# Altium PCB esp32_pico_d4_motor_driverV4.PcbDoc_2022-05-04.pcbdoc
Units mil, origin at the board's own origin, x right, y up, seen from the top; angles counter-clockwise.
Board outline 1279.91 x 1283.3 mil, 2 copper layers (Top Layer, Bottom Layer); 31 components, 53 nets, 163 pads, 53 vias.
Unrouted connection lines stored in the file: 1.
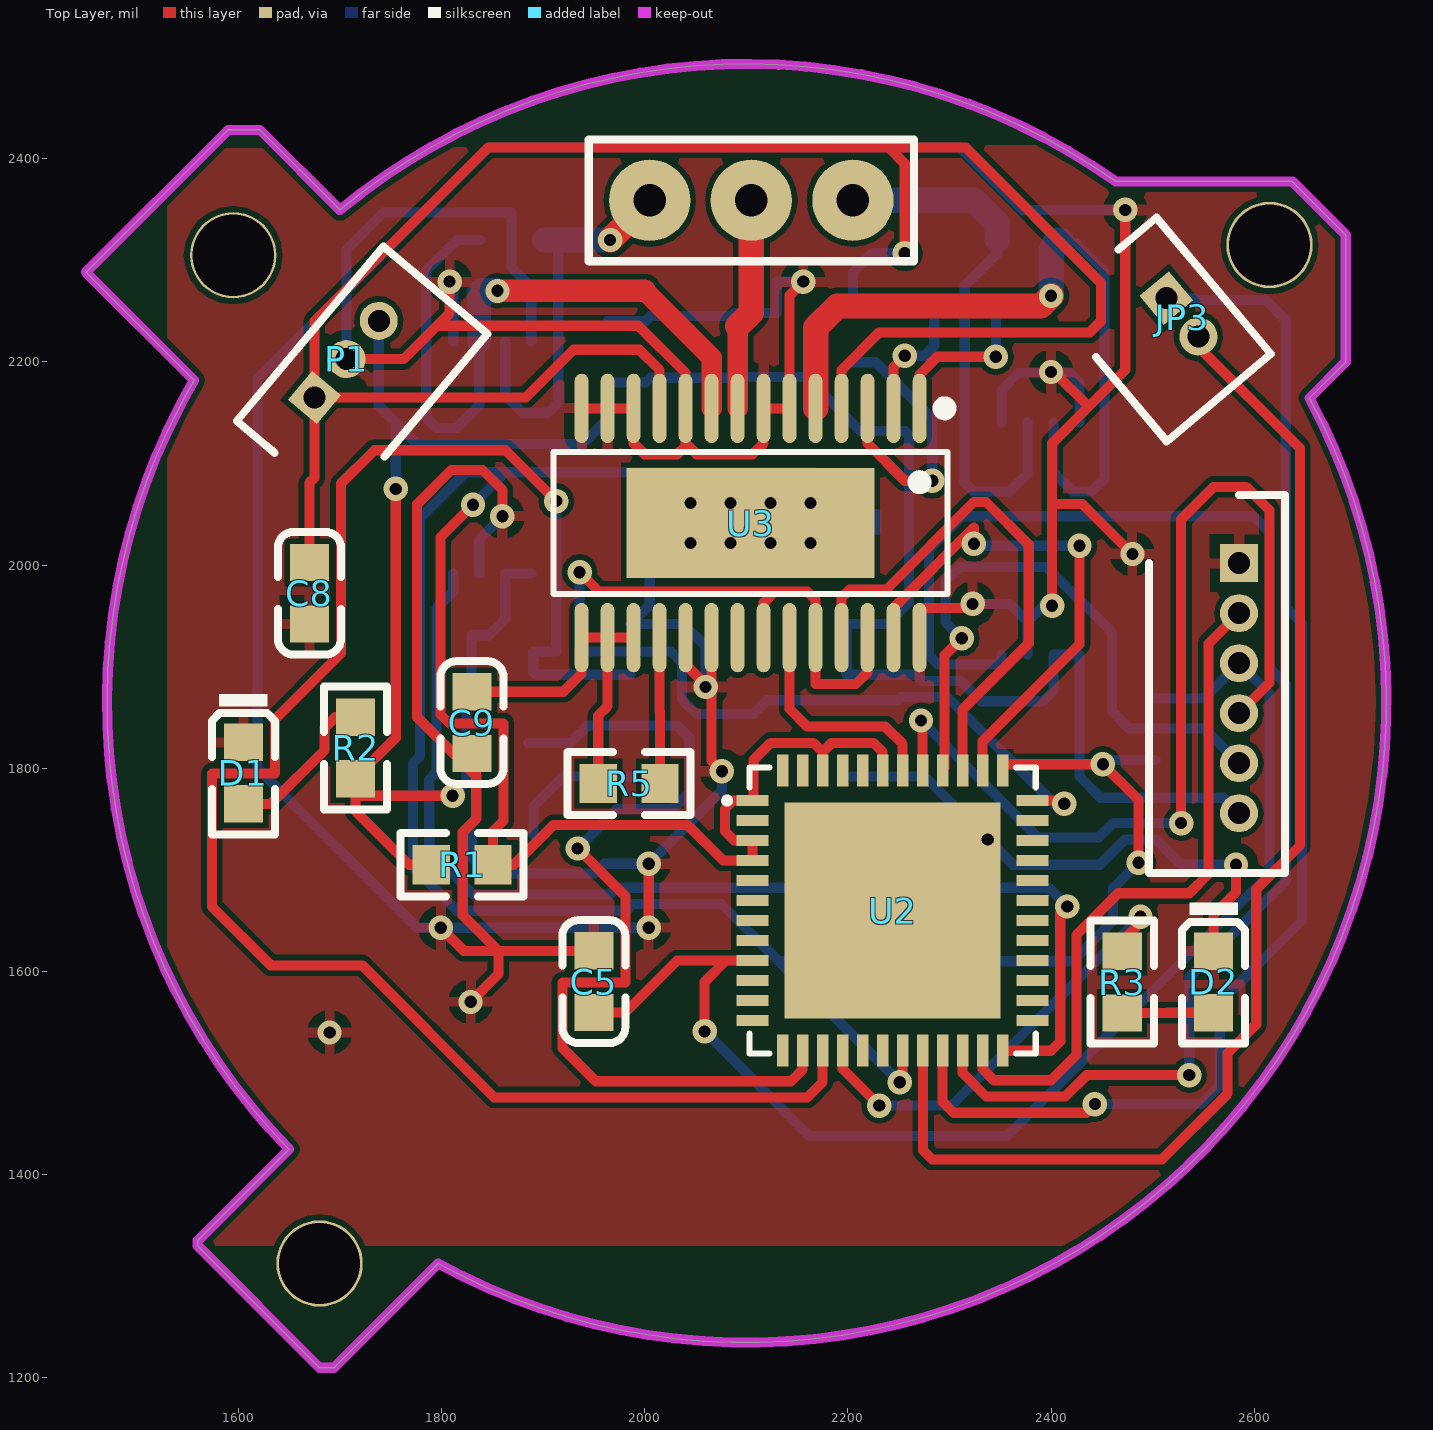
[diagram p0: Top Layer view]
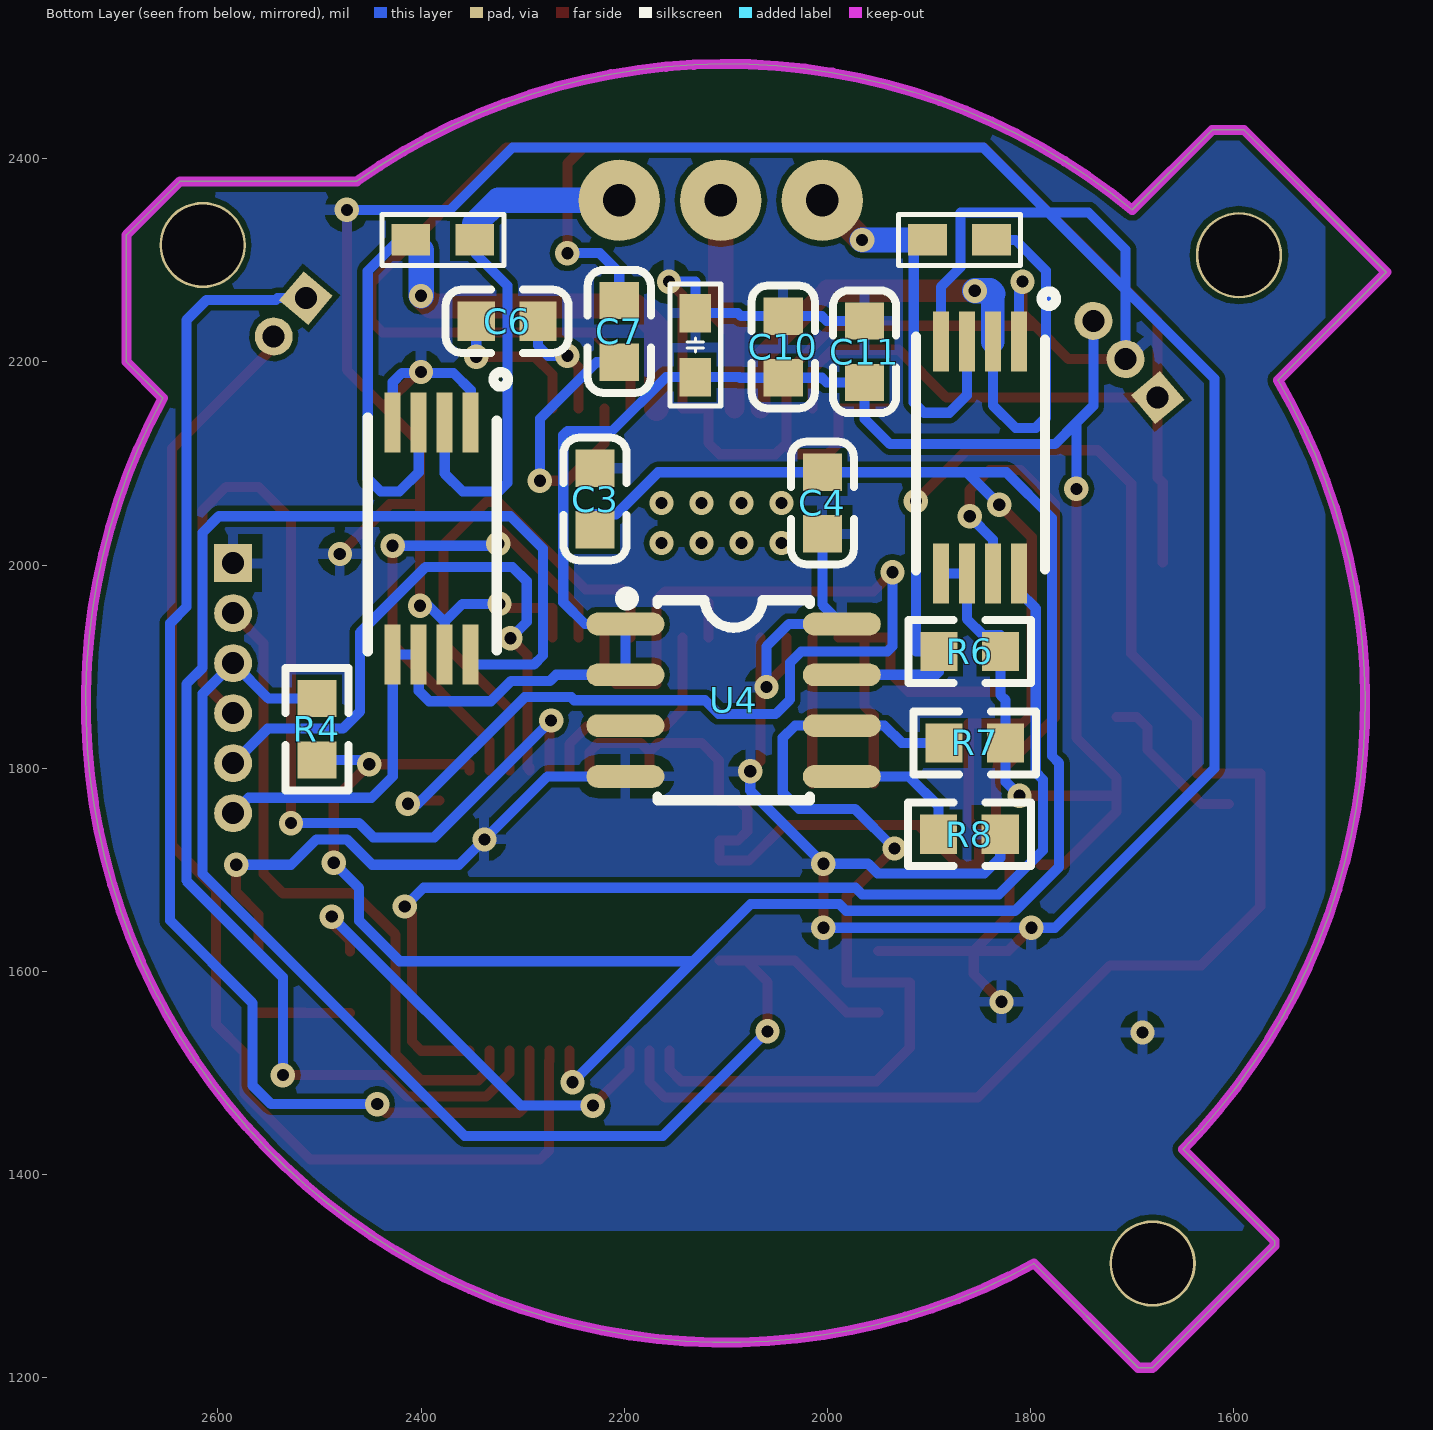
[diagram p1: Bottom Layer view, seen from below]

## Layer stack, top to bottom
Top Solder: solder mask 0.4, Solder Resist, Dk 3.5
Top Layer: signal copper 1.4
Dielectric1: dielectric 12.6, FR-4, Dk 4.8
Bottom Layer: signal copper 1.4
Bottom Solder: solder mask 0.4, Solder Resist, Dk 3.5

## Board outline
1560,1330 1560,1335 1650,1425 cw(c2100,1864.79) 1556.58,2181.99 1556.44,2181.85 1450,2288.3 1590,2428.3 1621.36,2428.3 1700.02,2349.64 1699.92,2349.54 cw(c2100,1864.79) 2463.34,2377.65 2637.35,2377.65 2690,2325 2690,2200 2654.33,2164.33 2654.26,2164.29 cw(c2100,1864.79) 1796.76,1312.57 1694.19,1210 1680,1210

## Design rules (kind name [scope] priority, off if disabled: settings)
Clearance [All] p1: gap=5.6 ignorepadtopadclearanceinfootprint=FALSE
HoleToHoleClearance [All] p1: gap=0 allowstackedmicrovias=TRUE
MinimumSolderMaskSliver [All] p1: minsoldermaskwidth=0
PolygonConnect [All] p1: connectstyle=Relief reliefconductorwidth=10 reliefentries=4 polygonreliefangle="90 Angle" airgapwidth=10
RoutingVias [All] p1: holewidth=12 width=24 viastyle="Through Hole" minholewidth=28 minwidth=50 maxholewidth=28 maxwidth=50
SilkToSilkClearance [All] p1: silktosilkclearance=0
SilkToSolderMaskClearance [IsPad] p1: minsilkscreentomaskgap=0 clearancetoexposedcopper=TRUE
SolderMaskExpansion [All] p1: expansion=4
Width [All] p1: maxlimit=50 minlimit=10 preferedwidth=10
26 further rules are at their usual default settings.

## Classes and differential pairs
component class "esp32_pico_d4_motor_driver.SchDoc_2022-05-04 (1)": C3 C4 C5 C6 C7 C8 C9 C10 C11 D1 D2 P1 R1 R2 R3 R4 R5 R6 R7 R8 U2 U3 U4 U5

## Components (designator, comment, footprint, x,y, rotation, side; value= is the part's Value field where it differs from the comment)
C3 "10uF" 0603_C#1 2228.75,2065 r270 bottom
C4 "100nF" 0603_C#1 2005,2061.09 r90 bottom
C5 "1uF" 0603_C#1 1950,1590 r270 top
C6 "10nF" 0603_C#1 2315.31,2240 r0 bottom
C7 "100nF" 0603_C#1 2205,2230 r90 bottom
C8 "10uF" 0603_C#1 1670,1972.29 r90 top
C9 "1uF" 0603_C#1 1830,1845 r90 top
C10 "100nF" 0603_C#2 2043.59,2214.69 r90 bottom
C11 "10uF (106) 10% 10V" 0603_C#2 1963.5,2210 r90 bottom
CBY1 "0.1μF" 0603C 2130,2216.5 r90 bottom
D1 "蓝灯 0603" 0603_LED_S1 1605,1795.32 r270 top
D2 "蓝灯 0603" 0603_LED_S1 2560,1589.68 r270 top
INA1 "INA240A2" INA240 2389.53,2026.29 r0 bottom
INA2 "INA240A1" INA240 1850,2105.72 r0 bottom
J1 "90120-0763" 10.7MHZ 2205,2359.05 r180 top
JP2 "SPI1" SHDR6 2585,2001.85 r270 top
JP3 "Header 2" SHDR2 2513.37,2262.7 r130 top
P1 "TB002-500-03BE" SHDR3 1675,2165 r230 top
R1 "0Ω (0R0) ±1%" 0603_R#1 1820.32,1705 r180 top
R2 "2KΩ" 0603_R#1 1715.39,1820 r270 top
R3 "2KΩ" 0603_R#1 2470,1589.49 r90 top
R4 "10K" 0603_R#1 2502.57,1838.42 r270 bottom
R5 "10K" 0603_R#1 1984.68,1785 r0 top
R6 "10KΩ" 0603_R#2 1860,1915 r0 bottom
R7 "10K" 0603_R#2 1855,1825 r0 bottom
R8 "1K" 0603_R#2 1860.32,1735 r0 bottom
R11 "10mOhm" 0603R 2378.5,2320 r180 bottom
R12 "10mOhm" 0603R 1870,2320 r0 bottom
U2 "ESP32-PICO-D4" QFN-48_L7.0-W7.0-P0.50-BL-EP5.4 2255,1660 r270 top
U3 "DRV8313PWPR" HTSSOP-28_L9.8-W4.5-P0.65-LS6.6-BL-EP 2104.25,2041.77 r180 top
U4 "AS5600-ASOM" SOIC-8_L5.0-W4.0-P1.27-LS6.0-BL 2135,1840 r90 bottom

## Footprints (in the part's own frame and the unit in brackets; to place one, negate y for a bottom-side part, rotate by r counter-clockwise, add the part's x,y. Pads: shape width x height; smd on the part's side, far side on the other; paste and mask are expansions set on the pad)
10.7MHZ [mil]
  round 80 hole 32: 1(0,0) 2(200,0) 3(100,0)
  silkscreen extent -60,-60 260,60
0603_C#1 [mm]
  rect 0.93x0.98 smd: 1(-0.77,0) 2(0.77,0)
  silkscreen extent -1.53,-0.79 1.54,0.79
0603_C#2 [mm]
  rect 0.93x0.98 smd: 1(0.77,0) 2(-0.77,0)
  silkscreen extent -1.54,-0.79 1.53,0.79
0603_LED_S1 [mm]
  rect 0.93x0.98 smd: A(0.77,0) K(-0.77,0)
  silkscreen extent -1.98,-0.79 1.54,0.79
0603_R#1 [mm]
  rect 0.93x0.98 smd: 1(-0.77,0) 2(0.77,0)
  silkscreen extent -1.54,-0.79 1.54,0.79
0603_R#2 [mm]
  rect 0.93x0.98 smd: 1(0.77,0) 2(-0.77,0)
  silkscreen extent -1.54,-0.79 1.54,0.79
0603C [mil]
  rect 38x31 smd: 1(-31.5,0) 2(31.5,0)
  silkscreen extent -60,-25 60,25
0603R [mil]
  rect 38x31 smd: 1(-31.5,0) 2(31.5,0)
  silkscreen extent -60,-25 60,25
HTSSOP-28_L9.8-W4.5-P0.65-LS6.6-BL-EP [mm]
  oval 0.343x1.731 smd: 1(-4.225,-2.856) 2(-3.575,-2.856) 3(-2.925,-2.856) 4(-2.275,-2.856) 5(-1.625,-2.856) 6(-0.975,-2.856) 7(-0.325,-2.856) 8(0.325,-2.856) 9(0.975,-2.856) 10(1.625,-2.856) 11(2.275,-2.856) 12(2.925,-2.856) 13(3.575,-2.856) 14(4.225,-2.856) 15(4.225,2.875) 16(3.575,2.875) 17(2.925,2.875) 18(2.275,2.875) 19(1.625,2.875) 20(0.975,2.875) 21(0.325,2.875) 22(-0.325,2.875) 23(-0.975,2.875) 24(-1.625,2.875) 25(-2.275,2.875) 26(-2.925,2.875) 27(-3.575,2.875) 28(-4.225,2.875)
  rect 6.2x2.75 smd: 29(0,0.009)
  silkscreen extent -5,-3.01 4.93,1.78
INA240 [mm]
  rect 0.4x1.5 smd mask+0.05: 1(-0.975,-2.9) 2(-0.325,-2.9) 3(0.325,-2.9) 4(0.975,-2.9) 5(0.975,2.9) 6(0.325,2.9) 7(-0.325,2.9) 8(-0.975,2.9)
  silkscreen extent -1.91,-4.16 1.6,2.82, body extent -1.5,-3.3 1.5,3.3, height 1.2
QFN-48_L7.0-W7.0-P0.50-BL-EP5.4 [mm]
  rect 0.28x0.8 smd: 1(-2.75,-3.778) 2(-2.25,-3.778) 3(-1.75,-3.778) 4(-1.25,-3.778) 5(-0.75,-3.778) 6(-0.25,-3.778) 7(0.25,-3.778) 8(0.75,-3.778) 9(1.25,-3.778) 10(1.75,-3.778) 11(2.25,-3.778) 12(2.75,-3.778) 25(2.75,3.222) 26(2.25,3.222) 27(1.75,3.222) 28(1.25,3.222) 29(0.75,3.222) 30(0.25,3.222) 31(-0.25,3.222) 32(-0.75,3.222) 33(-1.25,3.222) 34(-1.75,3.222) 35(-2.25,3.222) 36(-2.75,3.222)
  rect 0.8x0.28 smd: 13(3.5,-3.028) 14(3.5,-2.527) 15(3.5,-2.028) 16(3.5,-1.527) 17(3.5,-1.028) 18(3.5,-0.527) 19(3.5,-0.028) 20(3.5,0.473) 21(3.5,0.972) 22(3.5,1.473) 23(3.5,1.972) 24(3.5,2.473) 37(-3.5,2.473) 38(-3.5,1.972) 39(-3.5,1.473) 40(-3.5,0.972) 41(-3.5,0.473) 42(-3.5,-0.028) 43(-3.5,-0.527) 44(-3.5,-1.028) 45(-3.5,-1.527) 46(-3.5,-2.028) 47(-3.5,-2.527) 48(-3.5,-3.028)
  rect 5.4x5.4 smd: 49(0,-0.277)
  silkscreen extent -3.58,-4.49 3.58,3.3
SHDR2 [mm]
  rect 0.95x0.95 hole 0.55: 1(0,0)
  round 0.95 hole 0.55: 2(-1.25,0)
  silkscreen extent -2.75,-1.11 1.7,2.29
SHDR3 [mm]
  rect 0.95x0.95 hole 0.55: 1(0,0)
  round 0.95 hole 0.55: 2(-1.25,0) 3(-2.5,0)
  silkscreen extent -4,-1.11 1.7,2.29
SHDR6 [mm]
  rect 0.95x0.95 hole 0.55: 1(0,0)
  round 0.95 hole 0.55: 2(1.25,0) 3(2.5,0) 4(3.75,0) 5(5,0) 6(6.25,0)
  silkscreen extent -1.7,-2.25 7.75,1.15
SOIC-8_L5.0-W4.0-P1.27-LS6.0-BL [mil]
  oval 22.38x76.78 smd: 1(101.98,63.89) 2(51.98,63.89) 3(1.98,63.89) 4(-48.02,63.89) 5(-48.02,-149.11) 6(1.98,-149.11) 7(51.98,-149.11) 8(101.98,-149.11)
  silkscreen extent -71,-118 133,68

## Part data
CBY1: library part CAP_1
INA1 INA2: library part INA240
JP2: library part "HEADER 6"
JP3: "Header, 2-Pin"
R11: library part RES2
R12: library part Res1, "Resistor"

## Free pads (board coordinates)
  round 85 hole 80: 8(1595,2305) 8(1680,1312.57) 8(2615,2315)

## Via types
v1: diameter 24, hole 12, Top Layer to Bottom Layer, 38 vias
v2: diameter 24, hole 12, Top Layer to Bottom Layer, tented both sides, 8 vias
v3: diameter 23.62, hole 12, Top Layer to Bottom Layer, 7 vias

## Nets (pads, with @x,y where several pads share a name; then routed paths per layer and width w, separated by ;. In a path a pad name is that pad's centre, name@x,y a point inside that pad or via, vN(x,y) a via of type N, cw(c..) or ccw(c..) an arc to the next point about the centre after c; other vN are vias at no path point)
EN: C5.2 JP2.3 R4.1 U2.9 | length 1278.1
  Top Layer w10: C5.2 1981,1559.69 2032.11,1610.79 2080,1610.79 ; v1(2059,1541) 2059,1589.79 2080,1610.79 ; U2.9 2080,1610.79
  Bottom Layer w10: v1(2059,1541) 2162,1438 2357,1438 2615,1696 2615,1873.42 JP2.3 2550.31,1868.74 R4.1
ENA: U2.36 U3.22 U3.24 U3.26 | length 1148
  Top Layer w10: v1(1936,1993) 1955,1974 2128,1974 ; U3.22 2117.05,1963.05 2128,1974 ; U3.26 2219.41,1894.41 2208,1883 2168.23,1883 U3.24 2168.23,1965.77 2160,1974 2128,1974 ; U2.36 2409.73,1768.27 v1(2413,1765)
  Bottom Layer w10: v1(1936,1993) 1936,1920 1941,1915 2025.9,1915 2036.9,1904 2036.9,1867.59 2051,1853.49 2107,1853.49 2120.51,1867 2249.19,1867 2252.19,1870 2298.05,1870 2403.05,1765 v1(2413,1765)
FLASH_CLK: U2.31
FLASH_CS: U2.25
FLASH_SD0: U2.27
FLASH_SD1: U2.33
FLASH_SD2: U2.30
FLASH_SD3: U2.32
GND: C3.1 C4.1 C5.1 C8.1 C9.1 C10.1 C11.1 CBY1.2 D1.K D2.K INA1.1 INA1.4 INA1.7 INA2.1 INA2.4 INA2.7 JP2.1 P1.2 R8.2 U2.49 U3.6 U3.7 U3.10 U3.12 U3.13 U3.14 U3.19 U3.20 U3.28 U4.4 U4.8 | length 6654.3
  Top Layer w10: P1.2 1762.7,2202.7 1795.62,2235.62 ; v1(1799.32,1643) 1822,1620.32 1856,1620.32 ; v1(1808,2279) 1808,2248 1795.62,2235.62 ; v3(1828.72,1570.18) 1856,1597.45 1856,1620.32 ; C9.1 1834.27,1792 ; v1(1860,2048) 1860,2074 1840.44,2093.56 1809.56,2093.56 1776,2060 1776,1850.27 1834.27,1792 ; U3.14 U3.13 U3.12 1989.09,2119.91 2000,2109 2032,2109 2040.27,2117.27 2040.27,2120 ; C5.1 1856,1620.32 ; v1(2004,1643) v1(2004,1706) ; U3.19 2040.27,1902 2060,1882.27 v1(2060,1880) ; U3.20 2065.86,1807.14 v1(2076,1797) ; v1(2156,2279) 2142.64,2265.64 U3.6 U3.7 2117.05,2120 2106.05,2109 2051.27,2109 2040.27,2120 ; U3.28 2270.59,1957.67 2318.67,1957.67 v1(2322.79,1961.79) ; v3(2400,2189.93) 2403.07,2189.93 2437,2156 ; v1(2401,1960) 2401,2060 ; v1(2473,2349.54) 2473,2192 2437,2156 ; v3(2480,2010.94) 2430.94,2060 2401,2060 ; D2.K 2560,1656 2582,1678 v1(2582,1705) ; 1795.62,2235.62 1993.69,2235.62 2040.27,2189.04 U3.10 2040.27,2120 ; 1834.27,1792 1834.27,1750.4 1821,1737.13 1821,1655.32 1856,1620.32 ; 2401,2060 2401,2120 2437,2156
  Bottom Layer w10: P1.2 1706.63,2270.97 ; v1(1808,2279) 1811.61,2275.39 INA2.1 ; R8.2 1830,1712 1845.45,1696.55 1950.55,1696.55 1960,1706 v1(2004,1706) 2076,1778 v1(2076,1797) ; INA2.7 1837.2,2025.2 v1(1860,2048) ; INA2.4 1888.39,2273.61 1869,2293 1869,2347 1782.66,2347 ; C11.1 2001,2240.31 2005.69,2245 C10.1 2085,2245 2088,2248 CBY1.2 2130,2279 v1(2156,2279) ; v1(2004,1643) v1(1799.32,1643) 1776,1643 1619,1800 1619,2183.34 1706.63,2270.97 ; C4.1 2005,1961.09 U4.8 2038.02,1941.98 2060,1920 v1(2060,1880) ; U4.4 2275.69,1791.98 2362.67,1705 2448,1705 2473,1730 2503,1730 2528,1705 v1(2582,1705) ; v1(2322.79,1961.79) 2359.21,1961.79 2376.87,1944.13 ; INA1.1 2351.14,2172.14 2368,2189 2418.91,2189 2427.91,2180 INA1.4 ; v1(2401,1960) 2392.73,1960 2376.87,1944.13 ; v1(2473,2349.54) 2372.54,2349.54 2372,2349 2310,2411 1846.66,2411 1782.66,2347 ; 1706.63,2270.97 1782.66,2347 ; 1706.63,2270.97 1706.63,2310.63 1743,2347 1782.66,2347 ; 2376.87,1944.13 2376.73,1944 INA1.7 2376.87,1944.13
  other v3: 1690,1540 2337.67,1730
GPIO0: JP2.2 U2.23 | length 667.4
  Top Layer w10: U2.23 2332.66,1504 2343.66,1493 2400,1493 2425,1518 2425,1636 2466,1677 2536,1677 2555,1696 2555,1922.64 JP2.2
GPIO2: INA1.8 U2.22 | length 1388.3
  Top Layer w10: U2.22 2312.98,1500.02 2336,1477 2414,1477 2435,1498 v1(2536,1498)
  Bottom Layer w10: INA1.8 2351.14,1902 2289,1902 2280,1911 2280,2016 2312,2048 2599,2048 2615,2032 2615,1899 2631,1883 2631,1689.37 2536,1594.37 v1(2536,1498)
GPIO4: INA2.8 U2.24 | length 1135.1
  Top Layer w10: U2.24 2352.35,1522 2400,1522 2409,1531 2409,1657 v1(2416,1664)
  Bottom Layer w10: INA2.8 1811.61,1974 1795,1957.39 1795,1796 1788,1789 1788,1719 1831.29,1675.71 1965.72,1675.71 1972.41,1682.39 2397.61,1682.39 v1(2416,1664)
GPIO5: U2.34
GPIO9: U2.28
GPIO10: U2.29
GPIO12: U2.18
GPIO13: JP3.2 U2.20 | length 1244.9
  Top Layer w10: U2.20 2273.61,1512 2274,1511.61 2274,1424 2283,1415 2509,1415 2573.8,1479.8 2573.8,1519.8 2602,1548 2602,1681 2645,1724 2645,2115 2545,2215 JP3.2
GPIO14: U2.17
GPIO15: JP3.1 U2.21 | length 1258.6
  Top Layer w10: U2.21 2293.29,1471.71 2304,1461 2434.66,1461 v1(2443.13,1469.47)
  Bottom Layer w10: v1(2443.13,1469.47) 2547.47,1469.47 2566,1488 2566,1569.1 2647,1650.1 2647,1942.69 2631,1958.69 2631,2241 2611,2261 2543,2261 2541.3,2262.7 JP3.1
GPIO18: U2.35
GPIO19: U2.38 U3.27 | length 522.7
  Top Layer w10: U3.27 2245,1958 2324,2037 v1(2324,2021) ; U2.38 2332.66,1826.66 2428,1922 v1(2428,2019)
  Bottom Layer w10: v1(2324,2021) 2326,2019 v1(2428,2019)
GPIO21: U2.42 U3.23 | length 221.9
  Top Layer w10: U3.23 2142.64,1858.36 2160,1841 2236.92,1841 2253.92,1824 U2.42
GPIO22: U2.39 U3.25 | length 529.1
  Top Layer w10: U3.25 2193.82,1968 2201.82,1976 2238,1976 2324,2062 2336,2062 2378,2020 2378,1923.02 2312.98,1858 U2.39
GPIO25: R7.1 U2.14 U4.6 | length 908.6
  Top Layer w10: v1(1934,1721) 1981,1674 1981,1589 1919,1589 1919,1525 1952,1492 2144,1492 2155.5,1503.5 U2.14
  Bottom Layer w10: R7.1 1927,1825 1943.98,1841.98 U4.6 2032,1841.98 2044,1829.98 2044,1776 2028,1760 1973,1760 v1(1934,1721)
GPIO26: R6.1 U2.15 U4.7 | length 1755.3
  Top Layer w10: v1(1913,2063) 1863,2113 1734,2113 1701,2080 1701,1913 1636,1848 1636,1795 1574,1795 1574,1664 1632,1606 1722,1606 1852,1476 2160,1476 2175.18,1491.18 U2.15
  Bottom Layer w10: v1(1913,2063) 1913,1915 R6.1 1890.31,1894.87 1893.2,1891.98 U4.7
GPIO27: R3.2 U2.16 | length 445
  Top Layer w10: U2.16 2194.87,1504 v1(2230.87,1468) ; R3.2 2470,1630 2488,1648 v1(2488,1654)
  Bottom Layer w10: v1(2230.87,1468) 2302,1468 v1(2488,1654)
GPIO32: U2.12
GPIO33: U2.13
GPIO34: U2.10
GPIO35: U2.11
GPIO37: U2.7
GPIO38: U2.6
NetC6_1: C6.1 U3.2 | length 113.5
  Top Layer w10: U3.2 2245,2195 v1(2256,2206)
  Bottom Layer w10: v1(2256,2206) 2275,2206 2285,2216 C6.1
NetC6_2: C6.2 U3.1 | length 150.6
  Top Layer w10: U3.1 2270.59,2187.59 2288,2205 v1(2345.63,2205)
  Bottom Layer w10: v1(2345.63,2205) C6.2
NetC7_1: C7.1 U3.3 | length 275.5
  Top Layer w10: U3.3 2219.41,2119.59 2256,2083 v1(2283,2083)
  Bottom Layer w10: C7.1 2227.32,2199.68 2283,2144 v1(2283,2083)
NetC9_2: C9.2 R5.1 U3.15 U3.16 U3.17 | length 349.2
  Top Layer w10: C9.2 1920,1875.32 1937.91,1893.23 U3.15 U3.16 ; R5.1 1954.37,1852 1963.5,1861.13 U3.16 ; U3.17 U3.16
NetD1_A: D1.A R2.1 | length 158.6
  Top Layer w10: D1.A 1632,1765 1685,1818 1685,1840 1695.31,1850.31 R2.1
NetD2_A: D2.A R3.1 | length 90.1
  Top Layer w10: R3.1 2514,1559.18 2514.19,1559.37 D2.A
NetR5_2: R5.2 U3.18 | length 143.7
  Top Layer w10: U3.18 2014.68,1856.32 2015,1856 R5.2
NetR8_1: R8.1 U4.5 | length 135
  Bottom Layer w10: R8.1 1890.63,1762.61 1920,1791.98 U4.5
NetU2_2: U2.2
RXD: JP2.5 U2.40 | length 622
  Top Layer w10: U2.40 2293.29,1801.04 2295.19,1801.04 2295.19,1911.19 v1(2312,1928)
  Bottom Layer w10: v1(2312,1928) 2296,1944 2296,1984 2310,1998 2395.76,1998 2460,1933.76 2460,1856 2477,1839 2551,1839 JP2.5
SENSOR_VN: U2.8
SENSOR_VP: U2.5
TXD: JP2.4 U2.41 | length 980.3
  Top Layer w10: v1(2272,1847) 2273.61,1845.39 U2.41 ; v1(2528,1746) 2528,2045 2560,2077 2592,2077 2615,2054 2615,1884.21 JP2.4
  Bottom Layer w10: v1(2272,1847) 2387,1732 2447,1732 2461,1746 v1(2528,1746)
U: INA1.2 J1.1 R11.2 | length 529.7
  Bottom Layer w10: R11.2@2347,2307 2315,2275 2315,2081.09 2323.59,2072.5 2359.23,2072.5 2376.73,2090 INA1.2
  Bottom Layer w25: J1.1 2323.95,2359.05 2347,2336 R11.2
U_CS: INA1.3 R11.1 U3.5 | length 741
  Top Layer w25: U3.5 2168.23,2233.63 2189.6,2255 2390,2255 v3(2400,2265)
  Bottom Layer w10: INA1.3 2402.32,2091.41 2421.24,2072.5 2440,2072.5 2452.5,2085 2452.5,2289.5 R11.1@2425,2317
  Bottom Layer w25: v3(2400,2265) 2400,2310 2403.5,2313.5 2403.5,2317 2406.5,2320 R11.1
V: J1.3 U3.8 | length 210.4
  Top Layer w20: U3.8 2091.46,2235
  Top Layer w25: 2091.46,2235 2105,2248.54 J1.3
VDD3V3: C10.2 C11.2 CBY1.1 INA1.5 INA1.6 INA2.5 INA2.6 JP2.6 P1.3 R1.2 R2.2 R6.2 R7.2 U4.1 U4.2 | length 2416.2
  Top Layer w10: v1(1755,2075) 1755,1830 1715.39,1790.39 R2.2 R2.2@1715.39,1773 ; R1.2 1768,1705 1715.39,1757.61 R2.2@1715.39,1773 ; v1(1811,1773) R2.2@1715.39,1773
  Bottom Layer w10: P1.3 1738.27,2156.73 1755,2140 ; v1(1755,2075) 1755,2140 ; v1(1811,1773) 1824.68,1786.68 R7.2 1824.68,1867 1829.68,1872 R6.2 1829.68,1931 1846.8,1931 1862.8,1947 INA2.6 INA2.5 ; JP2.6 2569.79,1771 2448.79,1771 2427.91,1791.87 INA1.5 INA1.6 2402.32,1876.22 2392,1865.9 2331.29,1865.9 2311.19,1886 2273,1886 2267.02,1891.98 U4.2 U4.1 2238.71,1941.98 2260,1963.27 2260,2128 2256.03,2131.97 2212.03,2131.97 2159,2185 CBY1.1 2086.63,2185 2086,2184.37 C10.2 2005.69,2184.37 2001,2179.68 C11.2 1963.5,2144 1938.5,2119 1776,2119 1755,2140
VDD33: C3.2 C4.2 R1.1 R4.2 U2.1 U2.3 U2.4 U2.19 U2.37 U2.43 U2.46 | length 3220.6
  Top Layer w10: v1(1831,2059.41) 1799,2027.41 1799,1853 1808,1844 1861,1844 1861,1748.37 1850.63,1738 R1.1 1871.11,1705 1910.11,1744 2042.53,1744 2077.31,1709.21 U2.4 U2.3 2088,1728.9 2079,1737.9 2079,1760 2087.27,1768.27 U2.1 2107,1768.27 2107,1808 2124,1825 2166.18,1825 2175.18,1816 ; U2.46 2175.18,1816 ; U2.43 2234.24,1816 2225.24,1825 2184,1825 2175.18,1816.18 2175.18,1816 ; v1(2251,1491) 2253.92,1493.92 U2.19 ; U2.37 2352.35,1804 v1(2451,1804) 2486,1769 v1(2486,1707)
  Bottom Layer w10: v1(1831,2059.41) 1863,2091.41 ; C3.2 2228.75,2050 2208,2050 2166.59,2091.41 C4.2 1863,2091.41 ; v1(2251,1491) 2131.97,1610.03 ; v1(2451,1804) 2455.11,1808.11 R4.2 ; v1(2486,1707) 2460.95,1681.95 2460.95,1649.95 2421.03,1610.03 2131.97,1610.03 ; 1863,2091.41 1824,2091.41 1779,2046.41 1779,1812 1772,1805 1772,1703 1815.29,1659.71 1981.72,1659.71 1988.41,1666.39 2075.61,1666.39 2131.97,1610.03
VIN: C7.2 C8.2 P1.1 U3.4 U3.11 | length 2092.6
  Top Layer w10: C8.2 1670,2081 1675,2086 P1.1 ; U3.11 2014.68,2192 1994.68,2212 1930,2212 1883,2165 P1.1 ; U3.4 2193.82,2192 2230.82,2229 2438,2229 2449,2240 2449,2278 2316,2411 2240,2411 ; v1(2256,2307) 2256,2395 2240,2411 ; P1.1 1675,2240 1846,2411 2240,2411
  Bottom Layer w10: C7.2 2205,2288 2224,2307 v1(2256,2307)
W: INA2.3 J1.2 R12.2 | length 409.3
  Top Layer w25: v1(1965.95,2320) 1990,2344.05 J1.2
  Bottom Layer w10: INA2.3 1862.8,2167.2 1880,2150 1905,2150 1915,2160 1915,2310 1915,2320 R12.2
  Bottom Layer w25: R12.2 v1(1965.95,2320)
W_CS: INA2.2 R12.1 U3.9 | length 693.5
  Top Layer w20: 2000,2270 2065.86,2204.14 U3.9
  Top Layer w22: v3(1855,2270) 2000,2270
  Bottom Layer w10: INA2.2 1837.2,2157.2 1815,2135 1795,2135 1785,2145 1785,2290 1815,2320 R12.1
  Bottom Layer w23: INA2.2 1837.2,2267.2
  Bottom Layer w25: 1837.2,2267.2 1840,2270 v3(1855,2270)
pads on no net: U2.26 U2.44 U2.45 U2.47 U2.48 U3.21 U3.29 U4.3
copper on no net:
  other v2: 2045.19,2021.72 2084.56,2021.72 2123.93,2021.72 2163.3,2021.72 2045.19,2061.09 2084.56,2061.09 2123.93,2061.09 2163.3,2061.09

## Polygon pours and split planes (outlines as drawn)
GND on Bottom Layer "Bottom Layer-GND" (solid, remove dead copper, pour order 8): 1510,2480 1510,1345 2805,1345 2725,1425 2725,2480
GND on Top Layer "Top Layer-GND" (solid, remove dead copper, pour order 10): 1530,2410 1530,1375 1575,1330 2775,1330 2775,2370 2730,2415

## Keep-outs
Keep-Out Layer:
  lines w10: 1556.44,2181.85 1450,2288.3 1590,2428.3 1621.36,2428.3 1700.02,2349.64 ; 1556.58,2181.99 ccw(c2100,1864.79) 1650,1425 1560,1335 1560,1330 1680,1210 1694.19,1210 1796.76,1312.57 ccw(c2100,1864.79) 2654.26,2164.29 ; 1699.92,2349.54 cw(c2100,1864.79) 2463.34,2377.65 2637.35,2377.65 2690,2325 2690,2200 2654.33,2164.33